# Altium PCB PCB1.PcbDoc
Units mil, origin at the board's own origin, x right, y up, seen from the top; angles counter-clockwise.
Board outline 6000 x 4000 mil, 2 copper layers (Top Layer, Bottom Layer); 68 components, 47 nets, 259 pads, 0 vias.
Unrouted connection lines stored in the file: 162.
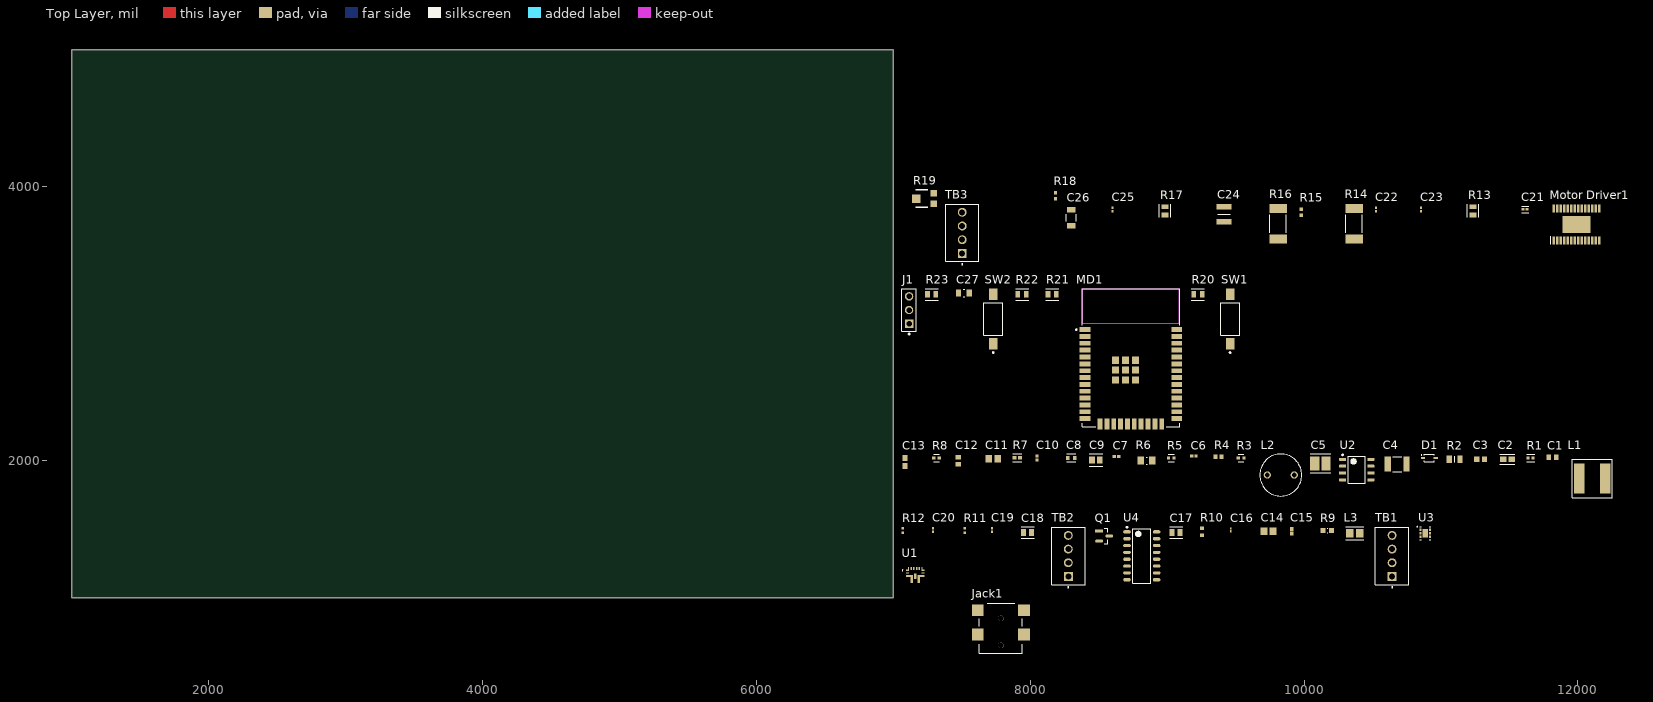
[diagram p0: Top Layer view]
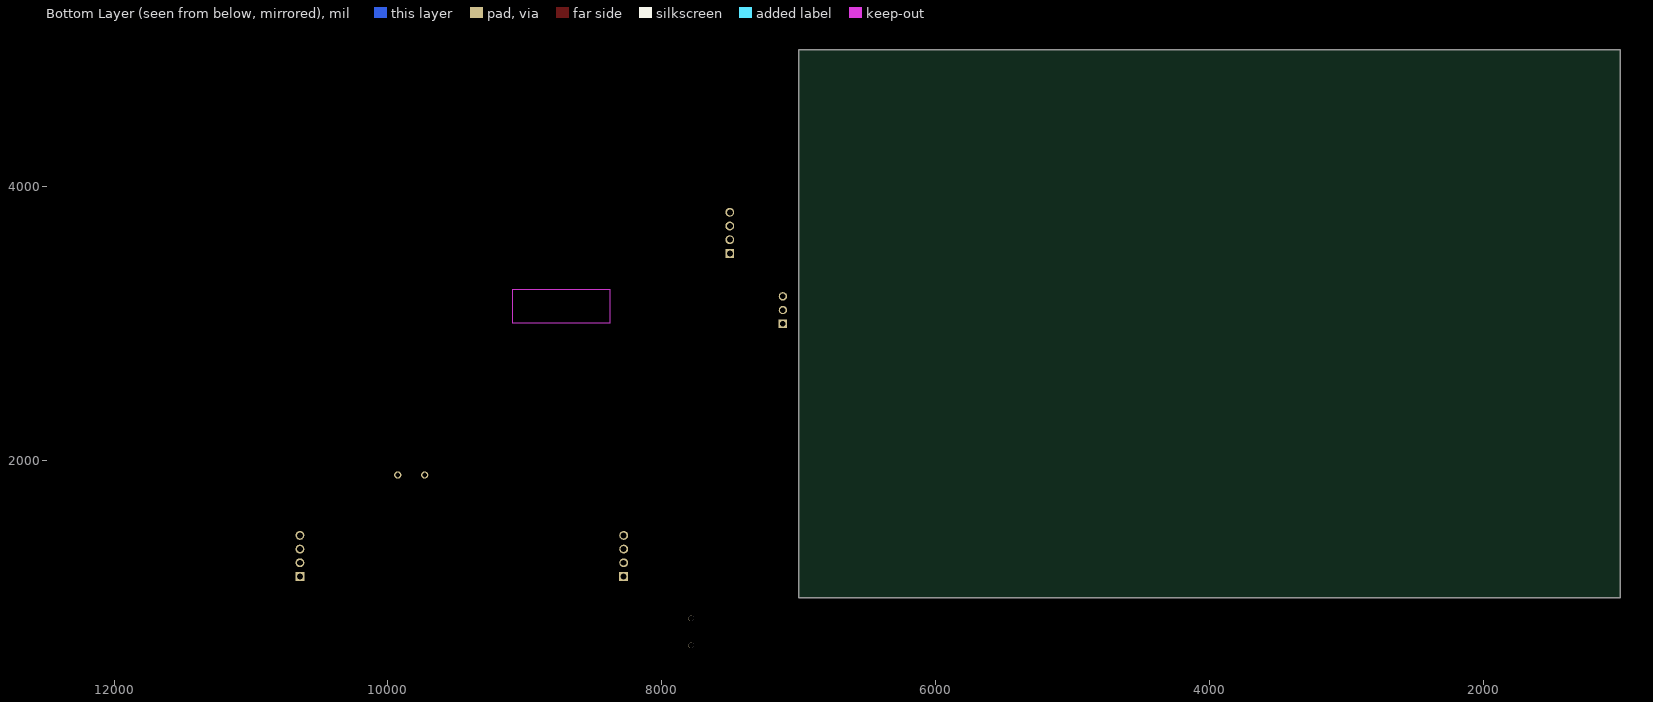
[diagram p1: Bottom Layer view, seen from below]

## Layer stack, top to bottom
Top Solder: solder mask 0.4, Solder Resist, Dk 3.5
Top Layer: signal copper 1.4
Dielectric 1: dielectric 12.6, FR-4, Dk 4.8
Bottom Layer: signal copper 1.4
Bottom Solder: solder mask 0.4, Solder Resist, Dk 3.5

## Board outline
1000,1000 7000,1000 7000,5000 1000,5000

## Design rules (kind name [scope] priority, off if disabled: settings)
Clearance [All] p1: gap=10 ignorepadtopadclearanceinfootprint=FALSE
PolygonConnect [All] p1: connectstyle=Relief reliefconductorwidth=10 reliefentries=4 polygonreliefangle="90 Angle" airgapwidth=10
RoutingVias [All] p1: holewidth=28 width=50 viastyle="Through Hole" minholewidth=28 minwidth=50 maxholewidth=28 maxwidth=50
SolderMaskExpansion [All] p1: expansion=4 istentingtop=FALSE
SupplyNets "Schematic Supply Nets" [InNet('GND')] p1: voltage=0.000
Width [All] p1: maxlimit=10 minlimit=10 preferedwidth=10
30 further rules are at their usual default settings.

## Classes and differential pairs
component class "Motor Driver": C22 C23 C24 C25 C26 C27 "Motor Driver1" R14 R19 R20 R21 R22 R23 TB3
component class MCU: C27 J1 MD1 R20 R21 R22 R23 SW1 SW2
component class "Main Power": C1 C2 C3 C4 C5 C6 C7 C8 C9 C10 C11 C12 C13 D1 Jack1 L1 L2 R1 R2 R3 R4 R5 R6 R7 R8 U1 U2
component class "5V DC/DC": C14 C15 C16 C17 C18 C19 C20 L3 Q1 R9 R10 R11 R12 TB1 TB2 U3 U4

## Components (designator, comment, footprint, x,y, rotation, side; value= is the part's Value field where it differs from the comment)
C1 "EMK107B7104KA-T" CAPC1608X95N 11815,2025 r0 top
C2 "GRM188R60J106ME47D" FP-GRM188-0_1-e0_2_0_55-IPC_A 11485,2010 r0 top
C3 "GRM188R71H104KA93D" CAPC1608X90X35ML10T15 11290,2010 r0 top
C4 "" FP-GRM32-IPC_A 10680,1975 r0 top value=22uF
C5 "GRM32ER61C476KE15L" FP-GRM32E-0_3-0_2-IPC_C 10120,1980 r0 top
C6 "" CAPC1005X55X25LL05T10 9195,2035 r0 top
C7 "GRM155R61A393KA01D" CAPC1005X55X25NL05T10 8630,2030 r0 top
C8 "GRM188R71A225KE15D" FP-GRM188-0_1-e0_2_0_5-MFG 8300,2020 r0 top
C9 "CL21C101JBANNNC" FP-CL21-IPC_C 8480,2005 r0 top
C10 "" CAPC1005X55X25LL05T10 8050,2020 r90 top
C11 "100uF" CAP_0805 7730,2015 r0 top
C12 "6.8pF" Ccomp2 7475,2000 r90 top
C13 "6.8pF" Ccomp 7085,1990 r90 top
C14 "15pF" CAP_0805 9740,1485 r0 top
C15 "4.7uF" CAPC1005X06N 9910,1485 r90 top
C16 "2.2uF" CAPC0402X02N 9465,1495 r90 top
C17 "GRM21BR61C106KE15L" FP-GRM21B-0_1-IPC_C 9065,1475 r0 top
C18 "GRM21BR61C106KE15L" FP-GRM21B-0_1-IPC_C 7980,1475 r0 top
C19 "GRM033C71C104KE14J" CAPC0603X33N 7720,1495 r90 top
C20 "GRM033C71C104KE14J" CAPC0603X33N 7290,1495 r90 top
C21 "0.01uF" FP-C0603-030-0_03-IPC_A 11615,3835 r0 top
C22 "0.1uF" CAPC0603X33N 10525,3835 r90 top
C23 "0.1uF" CAPC0603X33N 10855,3835 r90 top
C24 "100uF" CAPC3225X279N 9415,3800 r90 top
C25 "0.1uF" CAPC0603X33N 8600,3835 r90 top
C26 "0.47uF" FP-1206-L_3_2_0_2-W_1_6_0-MFG 8300,3775 r90 top
C27 "08055C104J4T2A" FP-0805-L_2_01_0_2-W_1_25-MFG 7515,3225 r0 top
D1 "0.54V" SODFL260X100-2N 10915,2020 r0 top
J1 "PREC003SAAN-RC" FP-PREC003SAAN-RC-MFG 7115,3100 r90 top
Jack1 "694102107102" 694102107102 7785.71,775.27 r0 top
L1 "XAL7070-222MEB" XAL7070332MEB 12105,1870 r0 top
L2 "" WE-TI-L 9830,1895 r0 top
L3 "" FP-CB2012-IPC_A 10370,1470 r0 top
MD1 "ESP32-WROOM-32" FP-ESP32-WROOM-32-MFG 8735,2750 r0 top
"Motor Driver1" "DRV8825PWP" SOP65P640X120-29N 11990,3725 r90 top
Q1 "MMSS8550-H-TP" FP-SOT-23-IPC_B 8540,1450 r0 top
R1 "169kOhm" FP-CRCW0402-e3-IPC_B 11655,2020 r0 top
R2 "CRCW0805931KFKEA" RESC2012X50N 11100,2010 r0 top
R3 "35.7kOhm" FP-CRCW0402-e3-MFG 9540,2020 r0 top
R4 "CRCW060339K2FKEA" RESC1609X50X30LL10T20 9375,2030 r0 top
R5 "10.2kOhm" FP-CRCW0402-e3-MFG 9030,2020 r0 top
R6 "CRCW080548K7FKEA" FP-CRCW0805-e3-IPC_A 8850,2000 r0 top
R7 "18.7kΩ" FP-AC0402-IPC_A 7905,2020 r0 top
R8 "3.24kOhm" FP-CRCW0402-e3-MFG 7315,2020 r0 top
R9 "" RESC0603(1608)_N 10170,1490 r0 top value="430000.00 Ohm"
R10 "" RESC1608X55X25LL10T15 9255,1480 r90 top
R11 "ERJ-2RKF1000X" RESC1005X40X25LL05T05 7520,1490 r90 top
R12 "ERJ-2RKF1000X" RESC1005X40X25LL05T05 7070,1490 r90 top
R13 "10kOhm" FP-ESR10-IPC_C 11235,3825 r90 top
R14 "200mOhm" WSL2512R2000FEA 10365,3730 r90 top
R15 "1MOhm" RESC1005X40N 9980,3815 r90 top
R16 "200mOhm" WSL2512R2000FEA 9810,3730 r90 top
R17 "10kOhm" FP-ESR10-IPC_C 8985,3825 r90 top
R18 "" RESC1005X40N 8185,3935 r90 top
R19 "" "SMD Pot" 7295,3875 r90 top
R20 "ESR10EZPD1002" FP-ESR10-IPC_C 9225,3215 r0 top
R21 "ESR10EZPD1002" FP-ESR10-IPC_C 8160,3215 r0 top
R22 "ESR10EZPD1002" FP-ESR10-IPC_C 7940,3215 r0 top
R23 "ESR10EZPD1002" FP-ESR10-IPC_C 7280,3215 r0 top
SW1 "FSMSM" TECO-FSMSM-2_V 9460,3035 r90 top
SW2 "FSMSM" TECO-FSMSM-2_V 7730,3035 r90 top
TB1 "TerminalBlocks" PHOENIX_1725672 10765,1095 r90 top
TB2 "TerminalBlock" PHOENIX_1725672 8400,1095 r90 top
TB3 "TerminalBlock" PHOENIX_1725672 7625,3455 r90 top
U1 "TPS61288RQQR" TPS61288RQQR 7160,1165 r0 top
U2 "TPS54231DR" D0008A_L 10385,1935 r0 top
U3 "TPS62122DRVR" PSON65P200X80_HS-7N 10885,1470 r0 top
U4 "HX711" TSOP127P600X160-16N 8815,1305 r0 top

## Footprints (in the part's own frame and the unit in brackets; to place one, negate y for a bottom-side part, rotate by r counter-clockwise, add the part's x,y. Pads: shape width x height; smd on the part's side, far side on the other; paste and mask are expansions set on the pad)
694102107102 [mm] "DC Power Jack Right Angled Low Profile SMT ?3.9 with 4 soldering pads & pegs"
  rect 2.2x2.2 smd: 1(-4.3,-1.15) 1(-4.3,3.35) 2(4.3,-1.15) 3(4.3,3.35)
  round 1 hole 1 unplated: MH1(0,1.85) MH2(0,-3.15)
  silkscreen extent -4,-4.65 4,4.65, body extent -4.9,-4.65 4.9,4.65, height 5.32
CAP_0805 [mm] "Chip Capacitor, 2-Leads, Body 2.00x1.25mm, IPC Medium Density"
  rect 1.25x1.4 smd: 1(-0.825,0) 2(0.825,0)
  body extent -1.05,-0.67 1.05,0.67, height 1.35
CAPC0402X02N [mm] "Chip Capacitor, 2-Leads, Body 0.40x0.20mm, IPC Medium Density"
  rect 0.4x0.32 smd: 1(-0.27,0) 2(0.27,0)
  body extent -0.21,-0.11 0.21,0.11, height 0.22
CAPC0603X33N [mm]
  rect 0.46x0.42 smd: 1(-0.33,0) 2(0.33,0)
  body extent -0.3,-0.15 0.3,0.15, height 0.33
CAPC1005X06N [mm] "Chip Capacitor, 2-Leads, Body 1.00x0.50mm, IPC Medium Density"
  rect 0.74x0.68 smd: 1(-0.43,0) 2(0.43,0)
  body extent -0.58,-0.33 0.58,0.32, height 0.65
CAPC1005X55X25LL05T10 [mm] "Chip Capacitor, 2-Leads, Body 1.05x0.55mm, IPC High Density"
  rect 0.56x0.52 smd: 1(-0.39,0) 2(0.39,0)
  body extent -0.53,-0.28 0.53,0.28, height 0.55
CAPC1005X55X25NL05T10 [mm] "Chip Capacitor, 2-Leads, Body 1.00x0.50mm, IPC Medium Density"
  rect 0.66x0.62 smd: 1(-0.44,0) 2(0.44,0)
  body extent -0.53,-0.28 0.53,0.27, height 0.55
CAPC1608X90X35ML10T15 [mm] "Chip Capacitor, 2-Leads, Body 1.7x0.9mm, IPC Low Density"
  rect 0.95x1.05 smd: 1(-0.725,0) 2(0.725,0)
  body extent -0.85,-0.45 0.85,0.45, height 0.9
CAPC1608X95N [mm]
  rect 0.81x0.99 smd: 1(-0.69,0) 2(0.69,0)
  body extent -0.82,-0.43 0.82,0.43, height 0.95
CAPC3225X279N [mm]
  rect 1.02x2.72 smd: 1(-1.4,0) 2(1.4,0)
  silkscreen extent 0,-1.15 0,1.15, body extent -1.6,-1.25 1.6,1.25, height 2.79
Ccomp [mm]
  rect 1.05x1 smd: 1(-0.75,0) 2(0.75,0)
  body extent -0.88,-0.48 0.87,0.47, height 0.9
Ccomp2 [mm]
  rect 0.84x1.02 smd: 1(-0.67,0) 2(0.67,0)
  body extent -0.89,-0.51 0.88,0.5, height 0.91
D0008A_L [mm] "SOIC, 8-Leads, Body 5x4mm, Pitch 1.27mm, IPC High Density"
  rrect18% 1.25x0.55 smd: 1(-2.625,1.905) 2(-2.625,0.635) 3(-2.625,-0.635) 4(-2.625,-1.905) 5(2.625,-1.905) 6(2.625,-0.635) 7(2.625,0.635) 8(2.625,1.905)
  silkscreen extent -2.75,-2.5 1.6,2.85, body extent -3,-2.45 3,2.45, height 1.63
FP-0805-L_2_01_0_2-W_1_25-MFG [mm]
  rect 1x1.25 smd paste+0 mask+0: 1(-1,0) 2(1,0)
  silkscreen extent -0.13,-0.72 0.13,0.72, body extent -1.6,-0.82 1.6,0.82, height 0.25
FP-1206-L_3_2_0_2-W_1_6_0-MFG [mm]
  rect 1x1.6 smd paste+0 mask+0: 1(-1.5,0) 2(1.5,0)
  silkscreen extent -0.63,-0.9 0.63,0.9, body extent -2.1,-1 2.1,1, height 0.25
FP-AC0402-IPC_A [mil]
  rect 28.16x26.48 smd paste+0 mask+0: 1(-18.84,0) 2(18.84,0)
  silkscreen extent -33,-29 33,29, body extent -41,-21 41,21, height 10
FP-C0603-030-0_03-IPC_A [mil]
  rect 21.9x18.22 smd paste+0 mask+0: 1(-13.91,0) 2(13.91,0)
  silkscreen extent -25,-25 25,25, body extent -33,-17 33,17, height 10
FP-CB2012-IPC_A [mil]
  rect 57.28x61.27 smd paste+0 mask+0: 1(-36.44,0) 2(36.44,0)
  silkscreen extent -65,-46 65,46, body extent -85,-50 85,50, height 10
FP-CL21-IPC_C [mil]
  rect 41.52x53.39 smd paste+0 mask+0: 1(-28.57,0) 2(28.57,0)
  silkscreen extent -49,-44 49,44, body extent -53,-32 53,32, height 10
FP-CRCW0402-e3-IPC_B [mil]
  rect 22.37x22.54 smd paste+0 mask+0: 1(-17.8,0) 2(17.8,0)
  silkscreen extent -29,-27 29,27, body extent -35,-17 35,17, height 10
FP-CRCW0402-e3-MFG [mm]
  rect 0.6x0.6 smd paste+0 mask+0: 1(-0.525,0) 2(0.525,0)
  silkscreen extent -0.53,-0.7 0.53,0.7, body extent -0.92,-0.4 0.92,0.4, height 0.25
FP-CRCW0805-e3-IPC_A [mil]
  rect 47.5x59.38 smd paste+0 mask+0: 1(-41.37,0) 2(41.37,0)
  silkscreen extent -3,-25 3,25, body extent -85,-49 85,49, height 10
FP-ESP32-WROOM-32-MFG [mm]
  rect 2x0.9 smd paste+0 mask+0: 1(-8.5,5.26) 2(-8.5,3.99) 3(-8.5,2.72) 4(-8.5,1.45) 5(-8.5,0.18) 6(-8.5,-1.09) 7(-8.5,-2.36) 8(-8.5,-3.63) 9(-8.5,-4.9) 10(-8.5,-6.17) 11(-8.5,-7.44) 12(-8.5,-8.71) 13(-8.5,-9.98) 14(-8.5,-11.25) 25(8.5,-11.25) 26(8.5,-9.98) 27(8.5,-8.71) 28(8.5,-7.44) 29(8.5,-6.17) 30(8.5,-4.9) 31(8.5,-3.63) 32(8.5,-2.36) 33(8.5,-1.09) 34(8.5,0.18) 35(8.5,1.45) 36(8.5,2.72) 37(8.5,3.99) 38(8.5,5.26)
  rect 0.9x2 smd paste+0 mask+0: 15(-5.715,-12.25) 16(-4.445,-12.25) 17(-3.175,-12.25) 18(-1.905,-12.25) 19(-0.635,-12.25) 20(0.635,-12.25) 21(1.905,-12.25) 22(3.175,-12.25) 23(4.445,-12.25) 24(5.715,-12.25)
  rect 1.33x1.33 smd paste+0 mask+0: 39(-2.835,-4.075) 39(-2.835,-2.24) 39(-2.835,-0.405) 39(-1,-4.075) 39(-1,-2.24) 39(-1,-0.405) 39(0.835,-4.075) 39(0.835,-2.24) 39(0.835,-0.405)
  Keep-Out Layer region: -9,6.45 9,6.45 9,12.75 -9,12.75
  Keep-Out Layer region: -9,6.45 9,6.45 9,12.75 -9,12.75
  silkscreen extent -10.25,-12.8 9.05,12.8, body extent -9.6,-13.35 9.6,12.9, height 0.25
FP-ESR10-IPC_C [mil]
  rect 33.79x49.69 smd paste+0 mask+0: 1(-30.59,0) 2(30.59,0)
  silkscreen extent -47,-42 47,42, body extent -51,-31 51,31, height 10
FP-GRM21B-0_1-IPC_C [mil]
  rect 37.71x49.69 smd paste+0 mask+0: 1(-28.63,0) 2(28.63,0)
  silkscreen extent -47,-42 47,42, body extent -51,-31 51,31, height 10
FP-GRM32-IPC_A [mm]
  rect 1.154x2.806 smd paste+0 mask+0: 1(-1.725,0) 2(1.725,0)
  silkscreen extent -0.85,-1.4 0.85,1.4, body extent -2.8,-1.9 2.8,1.9, height 0.25
FP-GRM32E-0_3-0_2-IPC_C [mil]
  rect 67.04x102.61 smd paste+0 mask+0: 1(-41.36,0) 2(41.36,0)
  silkscreen extent -75,-69 75,69, body extent -79,-57 79,57, height 10
FP-GRM188-0_1-e0_2_0_5-MFG [mm]
  rect 0.65x0.7 smd paste+0 mask+0: 1(-0.675,0) 2(0.675,0)
  silkscreen extent -0.85,-0.75 0.85,0.75, body extent -1.1,-0.55 1.1,0.55, height 0.25
FP-GRM188-0_1-e0_2_0_55-IPC_A [mil]
  rect 47.57x39.85 smd paste+0 mask+0: 1(-31.57,0) 2(31.57,0)
  silkscreen extent -55,-36 55,36, body extent -75,-40 75,40, height 10
FP-PREC003SAAN-RC-MFG [mm]
  rect 1.55x1.55 hole 1 paste-2539.97 mask+0: 1(-2.54,0)
  round 1.55 hole 1 paste-2539.97 mask+0: 2(0,0) 3(2.54,0)
  silkscreen extent -4.57,-1.37 3.96,1.37, body extent -4.06,-1.47 4.06,1.47, height 0.25
FP-SOT-23-IPC_B [mm]
  rect 1.474x0.585 smd paste+0 mask+0: 1(-0.935,0.95)
  rrect100% 1.474x0.585 smd paste+0 mask+0: 2(-0.935,-0.95) 3(0.935,0)
  silkscreen extent 0,-1.46 0.65,1.46, body extent -1.92,-1.71 1.92,1.71, height 0.25
PHOENIX_1725672 [mm]
  rect 1.65x1.65 / inner round 1.65 / far side rect 1.65x1.65 hole 1.1: 1(1.5,3.1)
  round 1.65 hole 1.1: 2(4.04,3.1) 3(6.58,3.1) 4(9.12,3.1)
  silkscreen extent -0.6,0 10.62,6.2, body extent -0.08,0 10.6,6.2, height 8.5
PSON65P200X80_HS-7N [mm] "PSON, 6-Leads, Body 2.00x2.00mm, Pitch 0.65mm, Thermal Pad 1.60x0.96mm, IPC Medium Density"
  rect 0.4x0.4 smd: 1(-0.88,0.65) 2(-0.88,0) 3(-0.88,-0.65) 4(0.88,-0.65) 5(0.88,0) 6(0.88,0.65)
  rect 0.96x1.6 smd: 7(0,0)
  silkscreen extent -1.5,-1.2 1.05,1.25, body extent -1.05,-1.05 1.05,1.05, height 0.8
RESC0603(1608)_N [mm] "Chip Resistor, Body 1.6x0.8mm, IPC Medium Density"
  rect 0.9x1 smd: 1(-0.8,0) 2(0.8,0)
  silkscreen extent -0.05,-0.4 0.05,0.4, body extent -0.85,-0.47 0.85,0.47, height 0.6
RESC1005X40N [mm]
  rect 0.7x0.6 smd: 1(-0.55,0) 2(0.55,0)
  body extent -0.5,-0.25 0.5,0.25, height 0.4
RESC1005X40X25LL05T05 [mm] "Chip Resistor, 2-Leads, Body 1.05x0.55mm, IPC High Density"
  rect 0.45x0.45 smd: 1(-0.4,0) 2(0.4,0)
  body extent -0.53,-0.28 0.53,0.28, height 0.4
RESC1608X55X25LL10T15 [mm] "Chip Resistor, 2-Leads, Body 1.60x0.80mm, IPC High Density"
  rect 0.6x0.8 smd: 1(-0.65,0) 2(0.65,0)
  body extent -0.85,-0.45 0.85,0.45, height 0.55
RESC1609X50X30LL10T20 [mm] "Chip Resistor, 2-Leads, Body 1.55x0.85mm, IPC High Density"
  rect 0.7x0.85 smd: 1(-0.575,0) 2(0.575,0)
  body extent -0.82,-0.48 0.82,0.48, height 0.5
RESC2012X50N [mm]
  rect 0.95x1.45 smd: 1(-1,0) 2(1,0)
  silkscreen extent 0,-0.53 0,0.53, body extent -1,-0.62 1,0.63, height 0.45
"SMD Pot" [mm]
  rect 1.2x1.2 smd: 1(0,0) 2(2,0)
  rect 1.6x1.5 smd: 3(1,3.25)
  silkscreen extent -0.64,1.14 2.64,3.3, body extent -0.48,-0.22 2.52,3.58, height 1.19
SODFL260X100-2N [mm] "SODFL, 2-Leads, Body 1.30x2.60mm, IPC Medium Density"
  rect 0.8x0.4 smd: 1(-1.175,0) 2(1.175,0)
  silkscreen extent -1.52,-0.7 0.9,0.7, body extent -0.9,-0.7 0.9,0.7, height 1
SOP65P640X120-29N [mm]
  rect 1.475x0.45 smd: 1(-2.938,4.225) 2(-2.938,3.575) 3(-2.938,2.925) 4(-2.938,2.275) 5(-2.938,1.625) 6(-2.938,0.975) 7(-2.938,0.325) 8(-2.938,-0.325) 9(-2.938,-0.975) 10(-2.938,-1.625) 11(-2.938,-2.275) 12(-2.938,-2.925) 13(-2.938,-3.575) 14(-2.938,-4.225) 15(2.938,-4.225) 16(2.938,-3.575) 17(2.938,-2.925) 18(2.938,-2.275) 19(2.938,-1.625) 20(2.938,-0.975) 21(2.938,-0.325) 22(2.938,0.325) 23(2.938,0.975) 24(2.938,1.625) 25(2.938,2.275) 26(2.938,2.925) 27(2.938,3.575) 28(2.938,4.225)
  rect 3.1x5.18 smd: 29(0,0)
  silkscreen extent -3.67,4.8 -2.2,4.8, body extent -3.3,-4.9 3.3,4.9, height 1.7
TECO-FSMSM-2_V [mm] "SMD, 2-Leads, Body 6x3.5mm, Pitch 9.19mm"
  rect 2.2x1.6 smd: 1(-4.595,0)
  rect 2.18x1.6 smd: 2(4.595,0)
  silkscreen extent -6.37,-1.75 3,1.75, body extent -4.98,-1.75 4.98,1.75, height 4.4
TPS61288RQQR [mm]
  rect 0.575x0.25 smd: 1(-1.413,0.875) 7(1.413,0.875)
  rect 0.225x0.45 smd: 1(-1.237,1.225) 7(1.237,1.225)
  rect 0.55x0.25 smd: 2(-1.425,0.375) 6(1.425,0.375)
  rect 1.25x0.4 smd: 3(-1.075,-0.2) 5(1.075,-0.2)
  rect 0.4x1.05 smd: 3(-0.65,-0.925) 5(0.65,-0.925)
  rect 0.4x1 smd: 4(0,-0.25)
  rect 0.25x0.55 smd: 8(0.75,1.175) 9(0.25,1.175) 10(-0.25,1.175) 11(-0.75,1.175)
  silkscreen extent -2.4,0.83 -2.3,0.92
TSOP127P600X160-16N [mm] "TSOP, 16-Leads, Body 9.90x3.90mm, Pitch 1.27mm, IPC Medium Density"
  oval 1.4x0.6 smd: 1(-2.75,4.445) 2(-2.75,3.175) 3(-2.75,1.905) 4(-2.75,0.635) 5(-2.75,-0.635) 6(-2.75,-1.905) 7(-2.75,-3.175) 8(-2.75,-4.445) 9(2.75,-4.445) 10(2.75,-3.175) 11(2.75,-1.905) 12(2.75,-0.635) 13(2.75,0.635) 14(2.75,1.905) 15(2.75,3.175) 16(2.75,4.445)
  silkscreen extent -2.87,-5.05 1.65,5.42, body extent -3,-5.05 3,5.05, height 1.6
WE-TI-L [mm] "THT Inductor, 2-Leads, Body 7.8 x 7.8 mm"
  round 1.35 hole 0.9: 1(-2.5,0) 2(2.5,0)
  silkscreen extent -3.9,-3.9 3.9,3.9, body extent -3.9,-3.9 3.89,3.9, height 9.5
WSL2512R2000FEA [mm]
  rect 1.65x3.25 smd: 1(-2.85,0) 2(2.85,0)
  silkscreen extent -1.65,-1.52 1.65,1.53, body extent -3.17,-1.59 3.17,1.59, height 0.64
XAL7070332MEB [mm]
  rect 1.92x5.5 smd: 1(-2.41,0) 2(2.41,0)
  silkscreen extent -3.75,-3.6 3.75,3.6, body extent -3.75,-3.6 3.75,3.6, height 7.1

## Part data
C1: "Capacitor", Manufacturer_Name="TAIYO YUDEN", Mouser Part Number=963-EMK107B7104KA-T, Arrow Part Number=EMK107B7104KA-T, Arrow Price/Stock=https://www.arrow.com/en/products/emk107b7104ka-t/taiyo-yuden, Datasheet Link=http://www.farnell.com/datasheets/746258.pdf, Height=0.95mm, Manufacturer_Part_Number=EMK107B7104KA-T, Mouser Price/Stock=https://www.mouser.co.uk/ProductDetail/TAIYO-YUDEN/EMK107B7104KA-T?qs=I6KAKw0tg2ybqzX8hKPgfw%3D%3D
C2: library part CMP-2006-02792-2, "Chip Multilayer Ceramic Capacitors for General Purpose, 0603, 10uF, X5R, 15%, 20%, 6.3V", Capacitance=10uF, Case Code (Imperial)=0603, Case Code (Metric)=1608, Dielectric=X5R, Max Operating Temperature=85°C, Min Operating Temperature=-55°C, Package Quantity=4000, Tolerance=20%, Voltage=6.3V, Case/Package=0603, Depth=0.8mm, Height=0.8mm, Lead Free="Lead Free", Length=1.6mm, Material=Ceramic, Mount="Surface Mount", Packaging="Tape and Reel", Radiation Hardening=No, REACH SVHC="No SVHC", Termination=SMD/SMT, Thickness=0.035inch, Voltage Rating=6.3V, Voltage Rating (DC)=6.3V, Width=0.031inch
C3: library part CMP-2100-03643-1, "Chip Capacitor, 0.1 uF, +/- 10%, 50 V, -55 to 125 degC, 0603 (1608 Metric), RoHS, Tape and Reel", Capacitance=100nF, Case Code (Imperial)=0603, Case Code (Metric)=1608, Dielectric=X7R, Dielectric Material=Ceramic, Insulation Resistance=10GR, Manufacturer=Murata, Max Operating Temperature=125degC, Min Operating Temperature=-55degC, Package Description="2-Pin Surface Mount Device, Body 1.6 x 0.8 mm", Package Quantity=1, Tolerance=10%, Voltage=50V, Case/Package=0603, Contact Plating=Tin, Datasheet URL=http://psearch.en.murata.com/capacitor/product/GRM188R71H104KA93%23.pdf, Datasheet Version=42675.0, Depth=0.8mm, Height=0.8mm, Lead Free=LeadFree, Length=1.6mm, Manufacturer URL=http://www.murata.com/, Material=Ceramic, Mount=SurfaceMount, Number of Pins=2, Package Reference=0603, Packaging=TapeandReel, Radiation Hardening=No, REACH SVHC=NoSVHC, RoHSCompliant=true, Termination=SMD/SMT, Thickness=0.035inch, Voltage Rating=50V, Voltage Rating (DC)=50V, Width=0.8mm
C4: library part Cin, "GRM32ER61E226KE15L", Capacitance=22uF, Manufacturer="Murata Electronics North America", Operating Temperature="-55°C ~ 85°C", Package=GRM32, Package / Case="1210 (3225 Metric)", Standard Package=1,000, Temperature="-55°C to +85°C", Temperature Characteristic=X5R, Temperature Range High=+85°C, Temperature Range Low=-55°C, Tolerance=10%, Voltage - Rated=25V, Applications="General Purpose", Automotive=No, Category=Cap, ComponentLink2Description=Datasheet, ComponentLink2URL=https://search.murata.co.jp/Ceramy/image/img/A01X/G101/ENG/GRM32ER61E226KE15-01A.pdf, Device Class L1="Passive Components", Device Class L2=Capacitors, Device Class L3="Ceramic Capacitors", Digikey Description="CAP CER 22UF 25V X5R 1210", Height=2.7mm, Lead Free=Yes, Manufacturer Part Number=GRM32ER61E226KE15L, Material=Ceramic, Mounting Type="Surface Mount, MLCC", Mouser Description="Multilayer Ceramic Capacitors MLCC - SMD/SMT 1210 22uF 25volts X5R 10%", Octopart=https://octopart.com/grm32er61e226ke15l-murata-197441, Other Names=490-3889-2, Packaging="Cut Tape (CT)", Possible Substitute=GRM32ER61E226KE15K, RoHS=TRUE, Size / Dimension="0.126\" L x 0.098\" W (3.20mm x 2.50mm)", Temperature Coefficient=X5R, Thickness (Max)="0.106\" (2.70mm)", Voltage Rating=25V
C5: library part CMP-2000-06362-2, "CAP CER 47UF 16V X5R 1210", Capacitance=47uF, Case Code (Imperial)=1210, Case Code (Metric)=3225, Dielectric=X5R, Max Operating Temperature=85°C, Min Operating Temperature=-55°C, Package Quantity=1, Tolerance=10%, Voltage=16V, Case/Package=1210, Depth=2.5mm, Height=2.5mm, Lead Free="Lead Free", Length=3.2mm, Material=Ceramic, Mount="Surface Mount", Number of Pins=2, Packaging="Cut Tape", Radiation Hardening=No, REACH SVHC="No SVHC", RoHS Compliant=Yes, Termination=SMD/SMT, Thickness=0.106inch, Voltage Rating=16V, Voltage Rating (DC)=16V, Width=0.098inch
C6: library part Cboot, "GRM155R71A104KA01D", Capacitance=100000pF, Case Size/Dimension=0402, Dielectric=X7R, Manufacturer=Murata, Package Description="2-Pin Surface Mount Device, Body 1 x 0.5 mm", Rated Voltage=10V, Tolerance (%)=±10%, Datasheet URL=http://search.murata.co.jp/Ceramy/image/img/A01X/G101/ENG/GRM155R71A104KA01-01.pdf, Datasheet Version=02/2016, Manufacturer URL=http://www.murata.com/, Mounting Technology=SurfaceMount, Package Reference=0402
C7: library part CMP-2008-04563-1, Manufacturer=Murata, Part Number=GRM155R61A393KA01D
C8: library part CMP-2006-02836-2, "Chip Multilayer Ceramic Capacitors for General Purpose, 0603, 2.2uF, X7R, 15%, 10%, 10V", Capacitance=2.2uF, Case Code (Imperial)=0603, Case Code (Metric)=1608, Dielectric=X7R, Max Operating Temperature=125°C, Min Operating Temperature=-55°C, Package Quantity=1, Tolerance=10%, Voltage=10V, Case/Package=0603, Depth=0.8mm, Height=0.8mm, Lead Free="Lead Free", Length=1.6mm, Material=Ceramic, Mount="Surface Mount", Number of Pins=2, Packaging="Cut Tape", REACH SVHC="No SVHC", Termination=SMD/SMT, Thickness=0.035inch, Voltage Rating=10V, Voltage Rating (DC)=10V, Weight=7.1E-05oz, Width=0.031inch
C9: library part CMP-13271-001949-1, "CL21 Series 0805 100pF 50V ±5% Tolerance C0G Multilayer Ceramic Chip Capacitor", Capacitance=100pF, Case Code (Imperial)=0805, Case Code (Metric)=2012, Dielectric=C0G, Max Operating Temperature=125°C, Min Operating Temperature=-55°C, Temperature Coefficient=300ppm/°C, Tolerance=5%, Voltage=50V, Case/Package=0805, Contact Plating=Tin, Depth=1.25mm, Height=0.65mm, Lead Free="Lead Free", Length=2mm, Material=Ceramic, Mount="Surface Mount", Packaging="Tape and Reel", Radiation Hardening=No, Thickness=0.03inch, Voltage Rating=50V, Voltage Rating (DC)=50V, Width=0.049inch
C10: library part CSS, "GRM155R71C822KA01D", Manufacturer=Murata, Part Number=GRM155R71C822KA01D
C11: library part CAP_0805, "Capacitor SMD 0805 Generic"
C12: library part Ccomp2, "06031U6R8BAT2A"
C13: library part Ccomp, "06031U6R8BAT2A"
C14: library part Cff, "CC0805JRNPO9BN150"
C15: library part Cout2, "GRM155R61A475MEAAD"
C16: library part Cin2, "C1005X5R1V225K050BC"
C17 C18: library part CMP-2007-03453-2, "Chip Multilayer Ceramic Capacitors for General Purpose, 0805, 10uF, X5R, 15%, 10%, 16V", Capacitance=10uF, Case Code (Imperial)=0805, Case Code (Metric)=2012, Dielectric=X5R, Max Operating Temperature=85°C, Min Operating Temperature=-55°C, Package Quantity=1, Tolerance=10%, Voltage=16V, Case/Package=0805, Depth=1.25mm, Height=1.25mm, Lead Free="Lead Free", Length=2mm, Material=Ceramic, Mount="Surface Mount", Packaging="Tape and Reel", Radiation Hardening=No, REACH SVHC="No SVHC", Termination=SMD/SMT, Thickness=0.053inch, Voltage Rating=16V, Voltage Rating (DC)=16V, Width=1.25mm
C19 C20: library part 0.1uF, Manufacturer_Name="Murata Electronics", Mouser Part Number=81-GRM033C71C104KE4J, Datasheet Link=http://www.murata.com/~/media/webrenewal/support/library/catalog/products/capacitor/mlcc/c02e.pdf, Geometry.Height=0.33mm, Manufacturer_Part_Number=GRM033C71C104KE14J, Mouser Price/Stock=https://www.mouser.co.uk/ProductDetail/Murata-Electronics/GRM033C71C104KE14J?qs=QzBtWTOodeU72T%252BpeIULSA%3D%3D
C21: "C0603X5R1C103M030BA", Capacitance=10nF, Case Code (Imperial)=0201, Case Code (Metric)=0603, Dielectric=X5R, Dielectric Material=Ceramic, Max Operating Temperature=85°C, Min Operating Temperature=-55°C, Package Quantity=15000, Tolerance=20%, Voltage Rating=16V, Case/Package=0201, Height=0.3mm, Lead Free="Lead Free", Length=0.024inch, Mount="Surface Mount", Packaging="Tape and Reel", RoHS Compliant=Yes, Termination=SMD/SMT, Thickness=0.013inch, Voltage Rating (DC)=16V, Weight=6E-06oz, Width=0.012inch
C22 C23 C25: "GRM033C71C104KE14J", Manufacturer_Name="Murata Electronics", Mouser Part Number=81-GRM033C71C104KE4J, Datasheet Link=http://www.murata.com/~/media/webrenewal/support/library/catalog/products/capacitor/mlcc/c02e.pdf, Geometry.Height=0.33mm, Manufacturer_Part_Number=GRM033C71C104KE14J, Mouser Price/Stock=https://www.mouser.co.uk/ProductDetail/Murata-Electronics/GRM033C71C104KE14J?qs=QzBtWTOodeU72T%252BpeIULSA%3D%3D
C24: "1210YD107MAT2A"
C26: library part CMP-04427-014563-1, "12065C474K4Z2A", Capacitance=470nF, Case Code (Imperial)=1206, Case Code (Metric)=3216, Dielectric=X7R, Max Operating Temperature=125°C, Min Operating Temperature=-55°C, Ratings=AEC-Q200, Tolerance=10%, Voltage Rating=50V, Case/Package=1206, Depth=1.6mm, Features="Soft Termination", Length=0.126inch, Mount="Surface Mount", Packaging="Tape and Reel", Radiation Hardening=No, RoHS Compliant=Yes, Series=FLEXITERM®, Thickness=0.06inch, Voltage Rating (DC)=50V, Width=0.063inch
C27: library part CMP-2007-04725-2, "Automotive Ceramic Capacitor, 0805, 100nF, 5%, X7R, 15%, 50V", Capacitance=100nF, Case Code (Imperial)=0805, Case Code (Metric)=2012, Dielectric=X7R, Max Operating Temperature=125°C, Min Operating Temperature=-55°C, Package Quantity=4000, Ratings=AEC-Q200, Tolerance=5%, Voltage Rating=50V, Case/Package=0805, Construction=Flat, Contact Plating=Tin, Depth=1.25mm, Dissipation Factor=2.5%, Height=0.94mm, Lead Free="Lead Free", Length=2.01mm, Mount="Surface Mount", Number of Pins=2, Packaging="Tape and Reel", Radiation Hardening=No, RoHS Compliant=Yes, Series=-, Termination=SMD/SMT, Thickness=0.037inch, Voltage Rating (DC)=50V, Width=0.049inch
D1: library part Schottky
J1: library part CMP-00595-22265080-1, "PREC003SAAN-RC Conn Header Vert 3POS 2.54MM", Color=Black, Current Rating=3A, Max Operating Temperature=105°C, Min Operating Temperature=-40°C, Connector Type="Male Pin", Contact Material="Nickel, Tin", Contact Mating Length=5.842mm, Contact Plating=Tin, Height=8.74mm, Mount="Through Hole", NexarPartId=22265080, Number of Contacts=3, Number of Positions=3, Number of Rows=1, Packaging=Bulk, Pitch=2.54mm, RoHS=Compliant, Termination=Solder
Jack1: library part "DC Power Jack", Color=Black, Current Rating=5A, Flammability Rating="UL94 V-0", Insulation Resistance=100MΩ, Max Operating Temperature=85°C, Min Operating Temperature=-40°C, Operating Supply Voltage=18V, Connector Type=Power, Contact Gender=Female, Contact Plating=Tin, Gender=Male, Housing Material=Polyamide, Mount="Surface Mount", NexarPartId=52645180, Packaging="Tape and Reel", REACH SVHC=Unknown, RoHS=Compliant, Shielding=Unshielded, Termination=SMD/SMT, Voltage Rating=18V, Voltage Rating (DC)=18V
L1: "Inductor", Manufacturer_Name=COILCRAFT, Mouser Part Number=994-XAL7070-222MEB, Datasheet Link=https://www.coilcraft.com/xal7070.cfm, Height=7mm, Manufacturer_Part_Number=XAL7070-222MEB, Mouser Price/Stock=https://www.mouser.co.uk/ProductDetail/Coilcraft/XAL7070-222MEB?qs=VJjuEbE9QBOHvtnxhiSHKw%3D%3D
L2: library part PAS-IND-INDUCTOR-2, "744772390", Inductance="39.0 ÂµH", ComponentLink1Description="Manufacturer Link", ComponentLink1URL=http://www.we-online.com, ComponentLink2Description=Datasheet, ComponentLink2URL=http://www.we-online.de/katalog/media/pdf/744772390.pdf, DatasheetVersion="ver 8, Oct-2009", PackageDescription="THT Inductor, 2-Leads, Body 7.8 x 7.8 mm", PackageReference=WE-TI-L, PackageVersion=2006
L3: library part L1, "CBC2012T220M", Case Code (Imperial)=0805, Case Code (Metric)=2012, Current Rating=190mA, DC Resistance (DCR)=4.81R, Inductance=22uH, Max DC Current=170mA, Max Operating Temperature=105°C, Min Operating Temperature=-40°C, Package Quantity=3000, Resistor Type=Wirewound, Self Resonant Frequency=16MHz, Test Frequency=2.52MHz, Tolerance=20%, Case/Package=0805, Core Material=Ferrite, Halogen Free="Halogen Free", Height=1.25mm, Height - Seated (Max)=0.057inch, Lead Free=Exempt, Length=0.079inch, Mount="Surface Mount", Number of Pins=2, Packaging="Tape and Reel", RoHS Compliant=Yes, Saturation Current=170mA, Series=CB, Shielding=Unshielded, Termination=SMD/SMT, Width=0.049inch
MD1: library part CMP-194065-000008-1, "RX TXRX MOD WIFI SURFACE MOUNT", Case/Package=SMD/SMT, Frequency=2.5GHz, Max Operating Temperature=85°C, Min Operating Temperature=-40°C, Operating Supply Voltage=3.6V, Package Quantity=550, Data Rate=150Mbps, Mount="Surface Mount", Packaging="Cut Tape", Sensitivity=-98dBm, Weight=0.088185oz
"Motor Driver1": "2.5A Stepper Motor Driver HTSSOP28 Texas Instruments DRV8825PWP, Stepper Motor Driver, 28-Pin HTSSOP", Manufacturer_Name="Texas Instruments", Mouser Part Number=595-DRV8825PWP, Datasheet Link=http://www.ti.com/lit/ds/symlink/drv8825.pdf, Geometry.Height=1.2mm, Manufacturer_Part_Number=DRV8825PWP, Mouser Price/Stock=https://www.mouser.co.uk/ProductDetail/Texas-Instruments/DRV8825PWP?qs=L4ss%2FyqpMWT%252BKNufX9tf3Q%3D%3D
Q1: library part CMP-56214-000002-1, "TRANS PNP 25V 1.5A SOT23", Case/Package=SOT-23, Collector Base Voltage (VCBO)=40V, Collector Emitter Breakdown Voltage=25V, Collector Emitter Saturation Voltage=500mV, Emitter Base Voltage (VEBO)=1.6V, Max Collector Current=1.5A, Max Operating Temperature=150°C, Max Power Dissipation=625mW, Min Operating Temperature=-55°C, Package Quantity=1, Transition Frequency=100MHz, Collector Emitter Voltage (VCEO)=500mV, Element Configuration=Single, Gain Bandwidth Product=100MHz, hFE Min=40, Lead Free="Lead Free", Max Breakdown Voltage=25V, Mount="Surface Mount", Packaging="Tape and Reel", Polarity=PNP
R1: library part CMP-2002-08234-2, "CRCW0402169KFKED", Case Code (Imperial)=0402, Case Code (Metric)=1005, Max Operating Temperature=155°C, Max Power Dissipation=63mW, Min Operating Temperature=-55°C, Package Quantity=10, Resistance=169kR, Temperature Coefficient=100ppm/°C, Tolerance=1%, Voltage Rating=50V, Case/Package=0402, Composition="Thick Film", Contact Plating=Tin, Depth=0.5mm, Features="Automotive AEC-Q200", Height=0.35mm, Lead Free="Lead Free", Length=1mm, Military Standard=Not, Mount="Surface Mount", Number of Pins=2, Number of Terminations=2, Packaging="Tape and Reel", Power Rating=63mW, Radiation Hardening=No, Termination=SMD/SMT, Voltage Rating (DC)=50V, Weight=2.3E-05oz, Width=0.02inch
R2: "Resistor", Manufacturer_Name=Vishay, Mouser Part Number=71-CRCW0805-931K-E3, Datasheet Link=http://www.vishay.com/docs/20035/dcrcwe3.pdf, Height=0.5mm, Manufacturer_Part_Number=CRCW0805931KFKEA, Mouser Price/Stock=https://www.mouser.com/Search/Refine.aspx?Keyword=71-CRCW0805-931K-E3
R3: library part CMP-2002-08543-2, "CRCW040235K7FKED", Case Code (Imperial)=0402, Case Code (Metric)=1005, Max Operating Temperature=155°C, Max Power Dissipation=63mW, Min Operating Temperature=-55°C, Package Quantity=10, Resistance=35.7kR, Temperature Coefficient=100ppm/°C, Tolerance=1%, Voltage Rating=50V, Case/Package=0402, Composition="Thick Film", Contact Plating=Tin, Depth=0.5mm, Features="Automotive AEC-Q200", Height=0.35mm, Lead Free="Lead Free", Length=1mm, Military Standard=Not, Number of Pins=2, Number of Terminations=2, Packaging="Tape and Reel", Power Rating=63mW, Radiation Hardening=No, Termination=SMD/SMT, Voltage Rating (DC)=50V, Weight=2.3E-05oz, Width=0.02inch, Working Voltage=50V
R4: library part CMP-2000-03290-1, Manufacturer="Vishay Dale", Part Number=CRCW060339K2FKEA
R5: library part CMP-2002-08138-2, "CRCW040210K2FKED", Case Code (Imperial)=0402, Case Code (Metric)=1005, Max Operating Temperature=155°C, Max Power Dissipation=63mW, Min Operating Temperature=-55°C, Package Quantity=10, Resistance=10.2kR, Temperature Coefficient=100ppm/°C, Tolerance=1%, Voltage Rating=50V, Case/Package=0402, Composition="Thick Film", Contact Plating=Tin, Depth=0.5mm, Features="Automotive AEC-Q200", Height=0.35mm, Length=1mm, Military Standard=Not, Mount="Surface Mount", Number of Pins=2, Number of Terminations=2, Packaging="Tape and Reel", Power Rating=63mW, Radiation Hardening=No, Termination=SMD/SMT, Weight=2.3E-05oz, Width=0.5mm
R6: library part CMP-2001-03948-2, "RES Thick Film, 48.7kΩ, 1%, 0.125W, 100ppm/°C, 0805", Case Code (Imperial)=0805, Case Code (Metric)=2012, Max Operating Temperature=155°C, Max Power Dissipation=125mW, Min Operating Temperature=-55°C, Package Quantity=10, Resistance=48.7kR, Temperature Coefficient=100ppm/°C, Tolerance=1%, Voltage Rating=150V, Case/Package=0805, Composition="Thick Film", Contact Plating=Tin, Depth=1.25mm, Features="Automotive AEC-Q200", Height=0.45mm, Lead Free="Lead Free", Length=2mm, Military Standard=Not, Number of Pins=2, Number of Terminations=2, Packaging="Tape and Reel", Power Rating=125mW, Radiation Hardening=No, Termination=SMD/SMT, Voltage Rating (DC)=150V, Weight=0.000194oz, Width=0.049inch
R7: library part CMP-03412-024020-2, "AC0402FR-0718K7L", Case/Package=0402, Max Operating Temperature=155°C, Max Power Dissipation=63mW, Min Operating Temperature=-55°C, Resistance=18.7kR, Resistor Type="Thick Film", Temperature Coefficient=100ppm/°C, Tolerance=1%, Features="Moisture Resistant", Height=0.015inch, Length=0.039inch, Number of Terminations=2, Packaging="Tape and Reel", RoHS Compliant=Yes, Series=AC, Width=0.02inch
R8: library part CMP-2002-08579-2, "CRCW04023K24FKED", Case Code (Imperial)=0402, Case Code (Metric)=1005, Max Operating Temperature=155°C, Max Power Dissipation=63mW, Min Operating Temperature=-55°C, Package Quantity=10, Resistance=3.24kR, Temperature Coefficient=100ppm/°C, Tolerance=1%, Voltage Rating=50V, Case/Package=0402, Composition="Thick Film", Contact Plating=Tin, Depth=0.5mm, Features="Automotive AEC-Q200", Height=0.35mm, Lead Free="Lead Free", Length=1mm, Military Standard=Not, Mount="Surface Mount", Number of Pins=2, Number of Terminations=2, Packaging="Tape and Reel", Power Rating=63mW, Radiation Hardening=No, Termination=SMD/SMT, Voltage Rating (DC)=50V, Weight=2.3E-05oz, Width=0.5mm
R9: library part RES, "RC0603FR-07430KL", Case-EIA=0603, Case-Metric=1608, Power="0.1 W", Tolerance="1 %", Technology=SMT
R10: library part RES-2, "RC0603FR-0782KL", Case Code - in=0603, Case Code - mm=1608, Manufacturer=Yageo, Operating Temperature Range=-55Cto+155C, Package / Case=0603(1608metric), Package Description="2-Pin Surface Mount Device, Body 1.6 x 0.8 mm", Power Rating=100mW, Resistance=82kOhms, Temperature Coefficient=100PPM/C, Tolerance=1%, Voltage Rating=75V, Brand=Yageo, Datasheet URL=http://www.yageo.com/documents/recent/PYu-RC_Group_51_RoHS_L_7.pdf, Datasheet Version="Rev. 7, 05/2017", Height=0.45mm, Length=1.6mm, Manufacturer URL=http://www.yageo.com/, Mounting Technology=SurfaceMount, Package Reference=0603, Packaging=Reel, Product=ThickFilmResistorsGeneralPurpose, Product Category=ThickFilmResistors, RoHS=True, Series=RC, Termination Style=SMD/SMT, Type=GeneralPurposeChipResistorSurfaceMount, Unit Weight=0.000071oz, Width=0.8mm
R11 R12: library part CMP-2002-00605-3, "Chip Resistor, 100 Ohm, +/- 1%, 100 mW, -55 to 155 degC, 0402 (1005 Metric), RoHS, Tape and Reel", Case Code (Imperial)=0402, Case Code (Metric)=1005, Manufacturer="Basic Passives", Max Operating Temperature="155 degC", Min Operating Temperature="-55 degC", Package Quantity=10000, Power Rating="100 mW", Resistance="100 Ohm", Tolerance=1%, Voltage Rating="50 V", Case\/Package=0402, ComponentLink1Description="Manufacturer URL", ComponentLink1URL=http://www.panasonic.com/, ComponentLink2Description=Datasheet, ComponentLink2URL=http://industrial.panasonic.com/cdbs/www-data/pdf/RDA0000/AOA0000C86.pdf, DatasheetVersion=04/2015, Height="0.35 mm", Length="1 mm", Mount="Surface Mount", Mounting Technology="Surface Mount", PackageDescription="2-Pin Surface Mount Device, Body 1 x 0.5 mm", PackageReference=0402, Packaging="Tape and Reel", PartNumber=ERJ-2RKF1000X, Pins=2, Radiation Hardening=No, REACH SVHC=Yes, RoHSCompliant=true, Width="0.5 mm"
R13 R17: library part CMP-08839-028179-1, "ESR10EZPD1002", RoHS Compliant=Yes
R14 R16: "WSL2512R2000FEA"
R15: "CRCW04021M00FKEDHP"
R18: library part 50kOhm, "CRCW040250K0FKED"
R19: library part 30kPot, "TC33X-2-303E Bourns"
R20 R21 R22 R23: library part CMP-08839-028179-1, "10kΩ ±0.5% 0.4W 0805 Anti-Surge Chip Resistor AEC-Q200", RoHS Compliant=Yes
SW1 SW2: library part CMP-2000-07511-1, "FSMSM Push Button Switch, 50 mA, -35 to 85 degC, 2-Pin SMD, RoHS, Bulk", Case\/Package=SMD/SMT, Contact Current Rating=50mA, Contact Resistance=100mOhm, Manufacturer="TE Connectivity", Max Operating Temperature=85degC, Max Voltage Rating (DC)=12V, Min Operating Temperature=-35degC, Operating Force=180gf, Package Description="2-Pin Surface Mount Device, Body 6 x 3.5 mm, Pitch 9.19 mm", Package Quantity=1000, Voltage Rating (DC)=24V, Actuator Length=1.07mm, Actuator Material=Polyamide, Contact Material=Brass, Contact Plating=Silver, Current Rating=50mA, Datasheet URL=http://www.te.com/commerce/DocumentDelivery/DDEController?Action=showdoc&DocId=Customer+Drawing%7F1437566-3%7FC2%7Fpdf%7FEnglish%7FENG_CD_1437566-3_C2_1437566_3_1_c.dwg.pdf%7F1437566-3, Datasheet Version="Rev. C2, 08/2014", Electrical Life=20000Cycles, ELV=Compliant, Illumination Type=Illuminated, Lead Free=LeadFree, Manufacturer URL=http://www.te.com/, Mechanical Life=20000Cycles, Mount=SurfaceMount, Mounting Technology=SurfaceMount, Orientation=Straight, Package Reference=FSMSM, Packaging=LoosePiece, REACH SVHC=Unknown, RoHSCompliant=true, Switch Travel=0.25mm, Termination=GullWing, Throw Configuration=SPST
TB1: library part TerminalBlock
U2: library part CMP-0323-00207-3, "Buck Step Down Regulator with 3.5 to 28 V Input and 0.8 to 25 V Output, -40 to 150 degC, 8-Pin SOIC (D), Green (RoHS & no Sb/Br)", Manufacturer="Texas Instruments", Rating=Catalog, Switch Current Limit(Typ)(A)=2.3, Code_JEDEC=MS-012AA, ComponentLink1Description=Datasheet, ComponentLink1URL=http://www.ti.com/general/docs/lit/getliterature.tsp?genericPartNumber=TPS54231&fileType=pdf, ComponentLink2Description="Package Specification", ComponentLink2URL=http://www.ti.com/litv/pdf/msoi002j, ComponentLink3Description="URL Link1", ComponentLink3URL="Samples URL:http://www.ti.com/product/tps54231#samples", DatasheetVersion=SLUS851C, Duty Cycle(Max)(%)=90, Eco-Plan="Green (RoHS & no Sb/Br)", Iout(Max)(A)=2, Iq(Typ)(mA)=0.11, Mounting Technology="Surface Mount", PackageDescription="8-Pin Plastic Small Outline Integrated Circuit, 4.9 x 3.9 mm, Pitch 1.27 mm Pitch", PackageReference=D0008A, PackageVersion="revM, Jun-2011", PartNumber=TPS54231DR, Regulated Outputs(#)=1, SubFamily="Step-Down Regulator", Topology=Buck, Vin(Max)(V)=28, Vin(Min)(V)=3.5, Vout(Max)(V)=25, Vout(Min)(V)=0.8
U3: library part TPS6212

## Nets (pads, with @x,y where several pads share a name; then routed paths per layer and width w, separated by ;. In a path a pad name is that pad's centre, name@x,y a point inside that pad or via, vN(x,y) a via of type N, cw(c..) or ccw(c..) an arc to the next point about the centre after c; other vN are vias at no path point)
GND: "Motor Driver1.14" "Motor Driver1.28" "Motor Driver1.29" C2.2 C3.1 C4.1 C5.2 C7.2 C8.2 C9.2 C10.2 C11.2 C12.1 C13.2 C15.1 C16.1 C17.2 C18.2 C19.2 C22.1 C24.1 C25.1 C26.2 C27.2 D1.2 Jack1.2 Jack1.3 R3.2 R6.2 R8.2 R10.2 R14.2 R16.2 R19.2 R22.2 R23.2 SW1.2 SW2.2 TB1.2 TB2.3 U1.3 U1.10 U2.7 U3.3 U4.5 U4.9 U4.10 U4.14 U4.15
NetC1_1: C1.1 L1.2 U1.4 U1.9
NetC1_2: C1.2 U1.8
NetC2_1: C2.1 C3.2 Jack1.1 L1.1 U1.6 U1.7
NetC4_2: "Motor Driver1.4" "Motor Driver1.11" C4.2 C5.1 C16.2 C22.2 C23.1 C24.2 C25.2 R1.1 R2.1 R15.1 U1.5 U2.2 U3.1 U3.2
NetC6_1: C6.1 U2.1
NetC6_2: C6.2 D1.1 L2.1 U2.8
NetC7_1: C7.1 R4.2
NetC8_1: C8.1 U1.11
NetC9_1: C9.1 R4.1 U1.2
NetC10_1: C10.1 U2.4
NetC11_1: "Motor Driver1.16" "Motor Driver1.17" C11.1 L2.2 R5.1 R20.1 R21.1
NetC12_2: C12.2 R7.2 U2.6
NetC13_1: C13.1 R7.1
NetC14_1: C14.1 R9.2 R10.1 U3.4
NetC14_2: C14.2 C15.2 C17.1 L3.2 Q1.2 R9.1 TB1.1 U3.5 U4.1 U4.16
NetC18_1: C18.1 Q1.3 TB2.4 U4.3
NetC19_1: C19.1 U4.6
NetC20_1: C20.1 R12.2 U4.8
NetC20_2: C20.2 R11.2 U4.7
NetC21_1: "Motor Driver1.1" C21.1
NetC21_2: "Motor Driver1.2" C21.2
NetC23_2: "Motor Driver1.3" C23.2 R15.2
NetC26_1: "Motor Driver1.15" C26.1 R13.1 R17.1 R18.1
NetC27_1: C27.1 MD1.3 R21.2 SW2.1
NetJ1_1: J1.1 MD1.34
NetJ1_2: J1.2 MD1.35
NetJ1_3: J1.3 MD1.1 MD1.15 MD1.38 MD1.39
NetL3_1: L3.1 U3.6
NetMD1_23: MD1.23 R23.1
NetMD1_24: MD1.24 R22.1
NetMD1_25: MD1.25 R20.2 SW1.1
"NetMotor Driver1_5": "Motor Driver1.5" TB3.1
"NetMotor Driver1_6": "Motor Driver1.6" R14.1
"NetMotor Driver1_7": "Motor Driver1.7" TB3.2
"NetMotor Driver1_8": "Motor Driver1.8" TB3.3
"NetMotor Driver1_9": "Motor Driver1.9" R16.1
"NetMotor Driver1_10": "Motor Driver1.10" TB3.4
"NetMotor Driver1_12": "Motor Driver1.12" "Motor Driver1.13" R18.2 R19.1 R19.3
"NetMotor Driver1_18": "Motor Driver1.18" R17.2
"NetMotor Driver1_27": "Motor Driver1.27" R13.2
NetQ1_1: Q1.1 U4.2
NetR1_2: R1.2 R3.1 U2.3
NetR2_2: R2.2 R6.1 U1.1
NetR5_2: R5.2 R8.1 U2.5
NetR11_1: R11.1 TB2.2
NetR12_1: R12.1 TB2.1
pads on no net: "Motor Driver1.19" "Motor Driver1.20" "Motor Driver1.21" "Motor Driver1.22" "Motor Driver1.23" "Motor Driver1.24" "Motor Driver1.25" "Motor Driver1.26" Jack1.MH1 Jack1.MH2 MD1.2 MD1.4 MD1.5 MD1.6 MD1.7 MD1.8 MD1.9 MD1.10 MD1.11 MD1.12 MD1.13 MD1.14 MD1.16 MD1.17 MD1.18 MD1.19 MD1.20 MD1.21 MD1.22 MD1.26 MD1.27 MD1.28 MD1.29 MD1.30 MD1.31 MD1.32 MD1.33 MD1.36 MD1.37 TB1.3 TB1.4 U3.7 U4.4 U4.11 U4.12 U4.13